# Altium PCB driver.PcbDoc
Units mil, origin at the board's own origin, x right, y up, seen from the top; angles counter-clockwise.
Board outline 1805.03 x 1255.03 mil, 2 copper layers (Top Layer, Bottom Layer); 24 components, 15 nets, 75 pads, 28 vias.
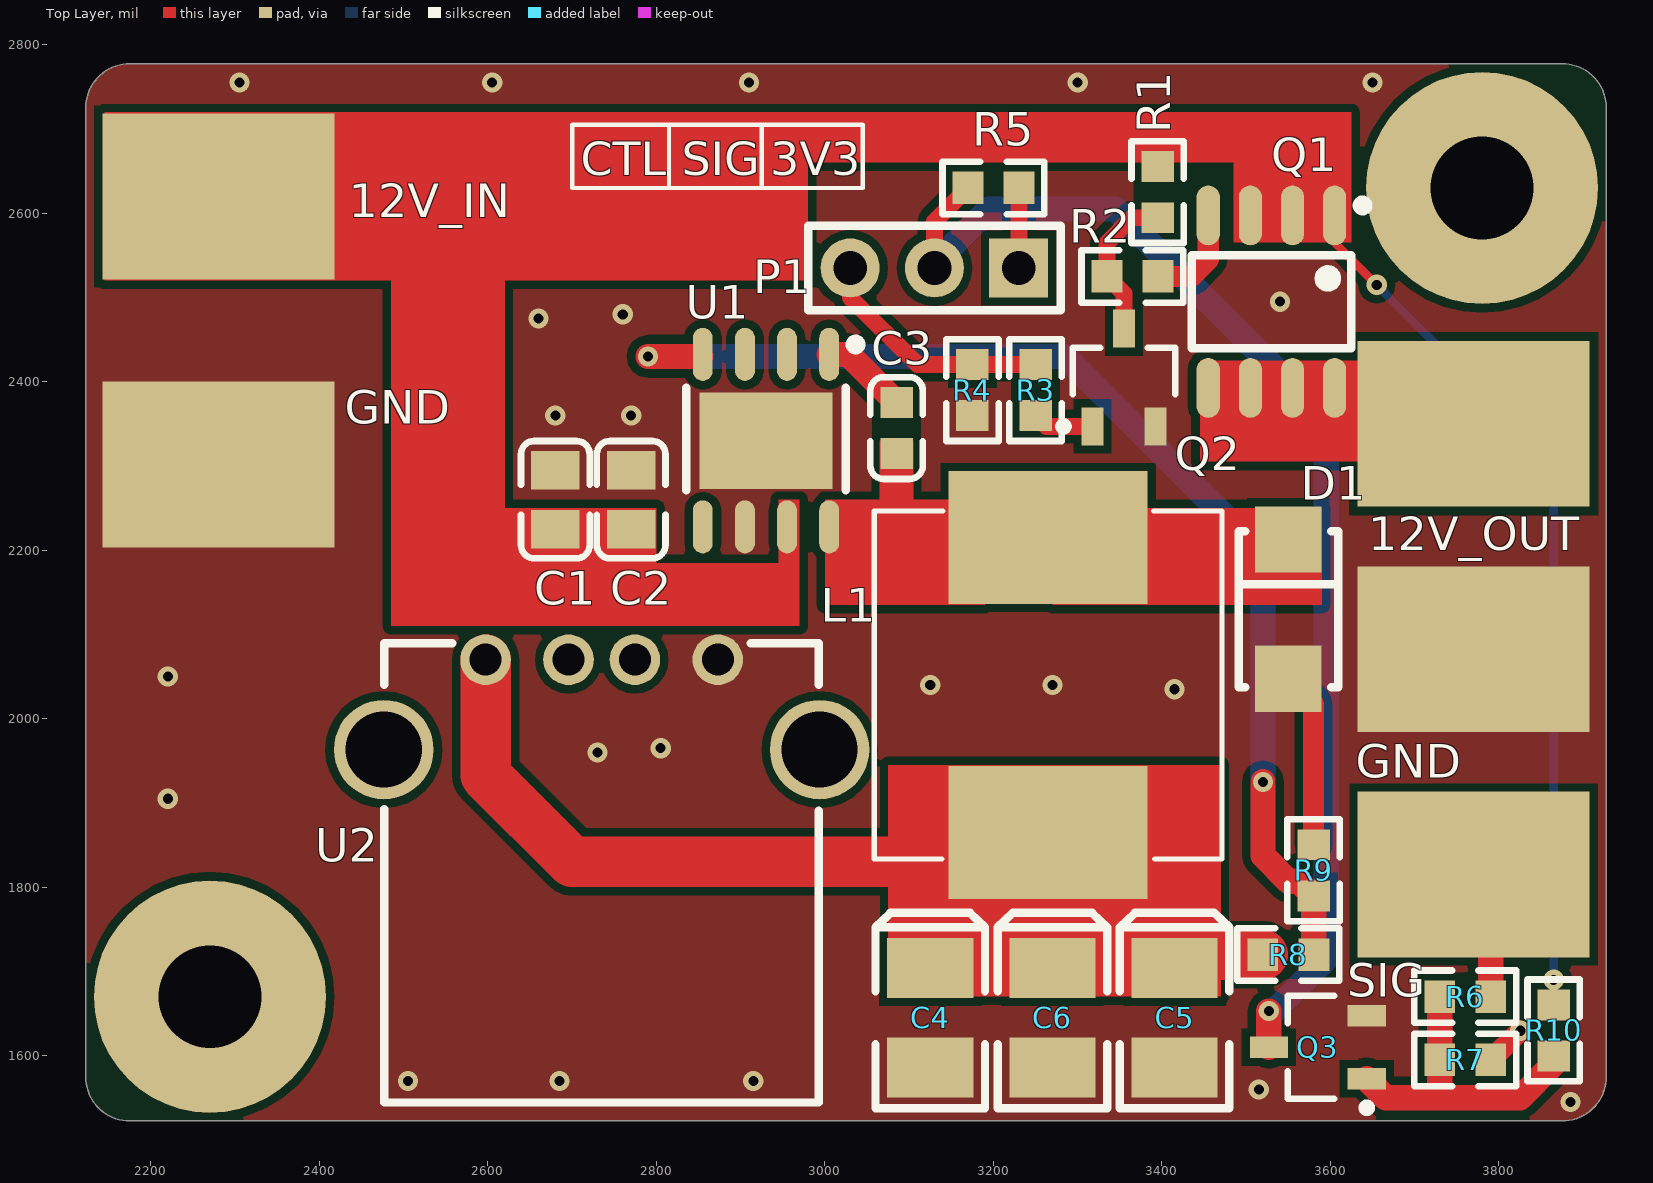
[diagram p0: Top Layer view]
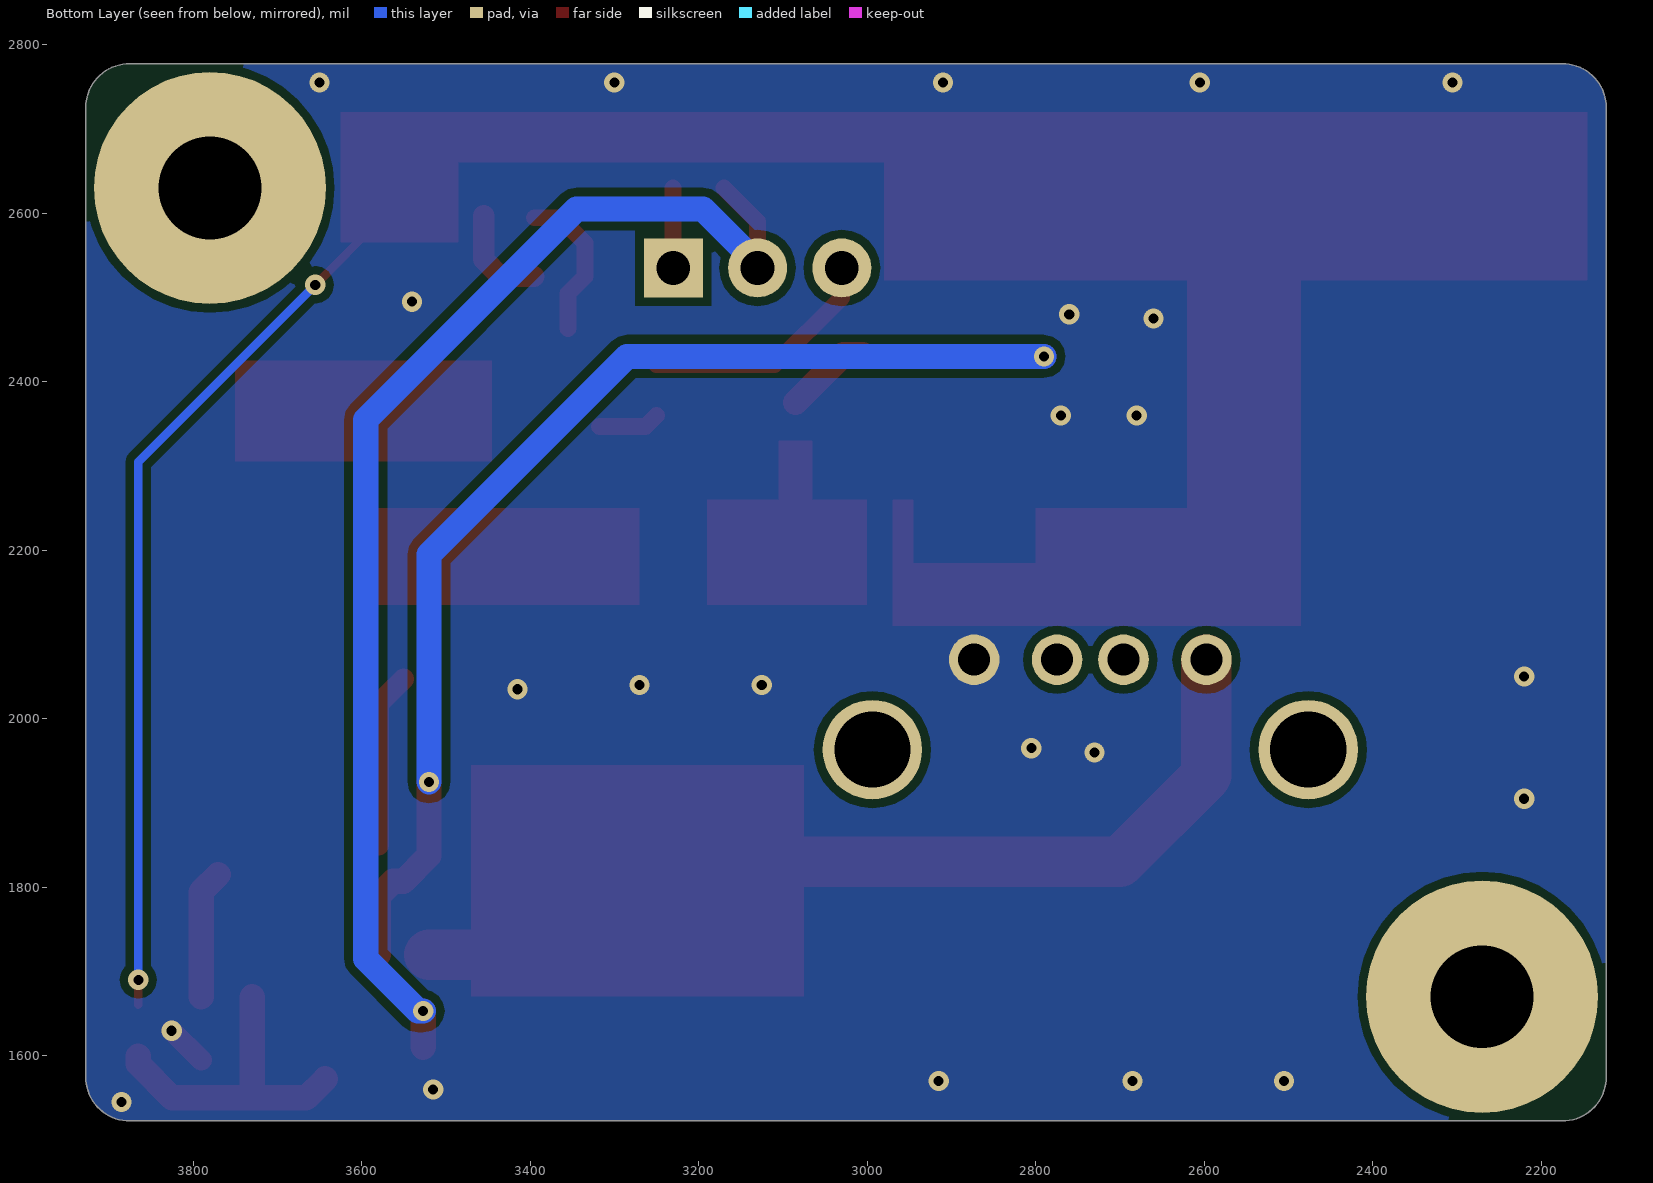
[diagram p1: Bottom Layer view, seen from below]
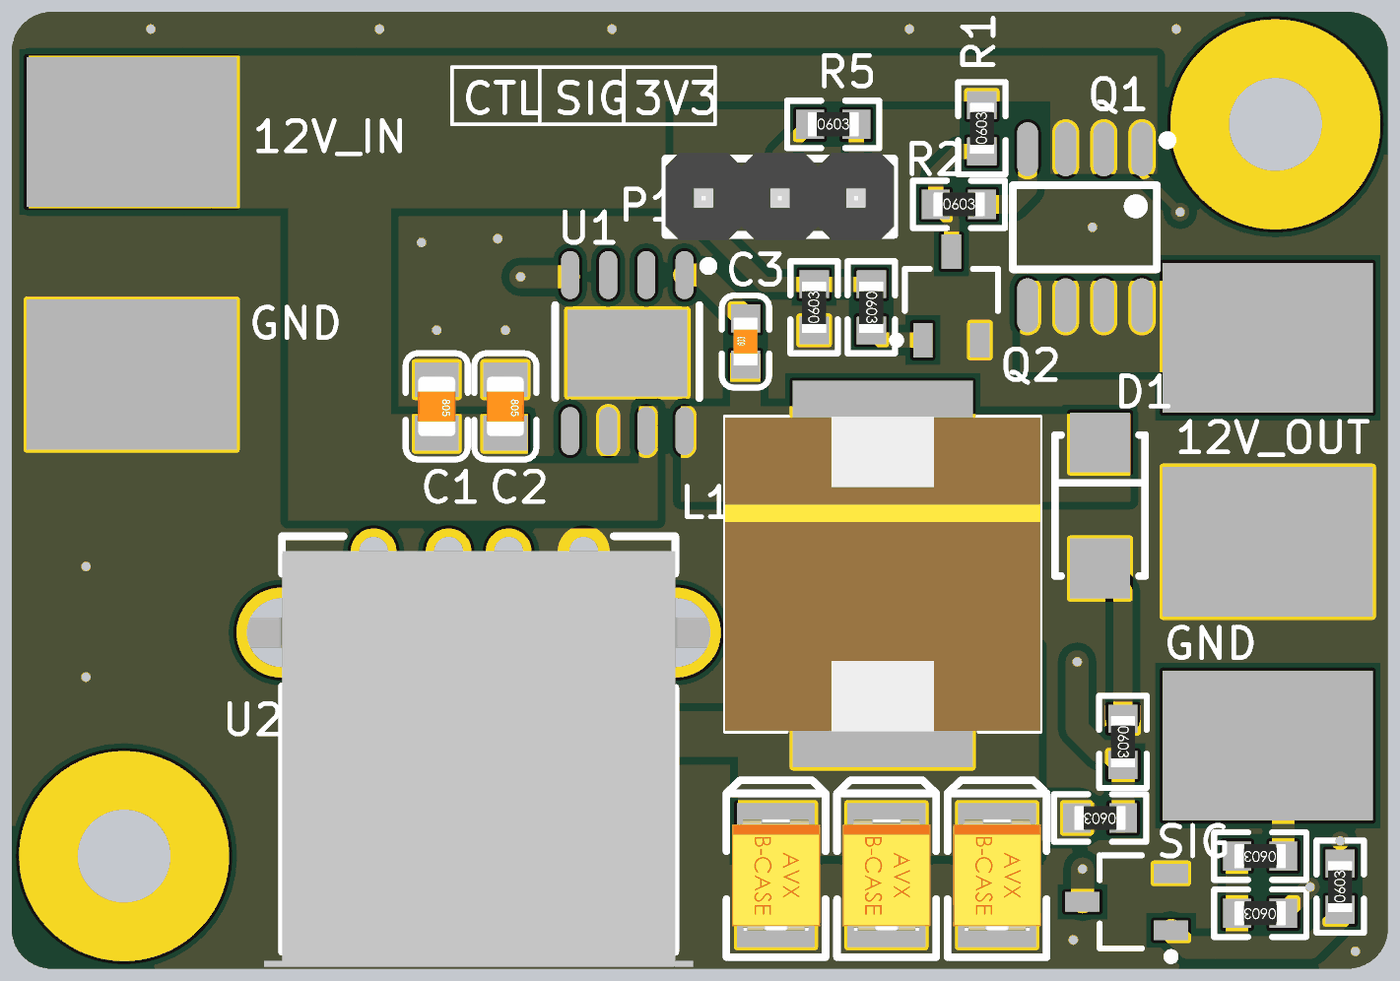
[diagram p2: 3D render of the assembled board from above, using the file's embedded part models]

## Layer stack, top to bottom
Top Solder: solder mask 0.4, Solder Resist, Dk 3.5
Top Layer: signal copper 1.4
Dielectric 1: dielectric 12.6, FR-4, Dk 4.8
Bottom Layer: signal copper 1.4
Bottom Solder: solder mask 0.4, Solder Resist, Dk 3.5

## Board outline
2122.49,1575 2122.49,2725 cw(c2175,2725) 2175,2777.51 3875,2777.51 cw(c3875,2725) 3927.51,2725 3927.51,1575 cw(c3875,1575) 3875,1522.48 2175,1522.48 cw(c2175,1575)

## Design rules (kind name [scope] priority, off if disabled: settings)
Clearance [All] p1: gap=10 ignorepadtopadclearanceinfootprint=FALSE except(0: Arc-Hole Track-Hole SMDPad-Hole THPad-Hole Via-Hole Fill-Hole Poly-Hole Region-Hole Text-Hole)
PolygonConnect [All] p1: connectstyle=Direct reliefconductorwidth=10 reliefentries=4 polygonreliefangle="90 Angle" airgapwidth=10
RoutingVias [All] p1: holewidth=28 width=50 viastyle="Through Hole" minholewidth=12 minwidth=12 maxholewidth=28 maxwidth=50
SolderMaskExpansion [All] p1: expansion=4
Width [All] p1: maxlimit=250 minlimit=10 preferedwidth=10
30 further rules are at their usual default settings.

## Components (designator, comment, footprint, x,y, rotation, side; value= is the part's Value field where it differs from the comment)
C1 "22uF (226) 20% 25V" 0805_C 2680,2260 r270 top
C2 "22uF (226) 20% 25V" 0805_C 2770,2260 r270 top
C3 "10nF (103) 10% 50V" 0603_C 3085,2345 r90 top
C4 "100uF (107) ±10% 6.3V" CASE-B_3528 3125,1645 r90 top
C5 "100uF (107) ±10% 6.3V" CASE-B_3528 3415,1645 r90 top
C6 "100uF (107) ±10% 6.3V" CASE-B_3528 3270,1645 r90 top
D1 "SS54" SMA(DO-214AC)_S1 3550,2130 r270 top
L1 "7447798131" WE-PDF-1045 3265,2040 r270 top value=13uH
P1 "0.1\" 3POS Header SNGL" "3 POS HEADER SINGLE ROW" 3230,2535 r180 top
Q1 "AO4407A" SOIC-8_150mil 3530,2495 r180 top
Q2 "AO3400A N道沟 X0YV1T SOT-23" SOT-23-3L 3355,2405 r270 top
Q3 "AO3400A N道沟 X0YV1T SOT-23" SOT-23-3L 3585,1610 r0 top
R1 "10KΩ (1002) ±1%" 0603_R 3395,2625 r90 top
R2 "1KΩ (1001) ±1%" 0603_R 3365,2525 r0 top
R3 "1KΩ (1001) ±1%" 0603_R 3250,2390 r270 top
R4 "10KΩ (1002) ±1%" 0603_R 3175,2390 r90 top
R5 "10KΩ (1002) ±1%" 0603_R 3200,2630 r0 top
R6 "30KΩ (3002) ±1%" 0603_R 3760,1670 r180 top
R7 "10KΩ (1002) ±1%" 0603_R 3760,1595 r180 top
R8 "10KΩ (1002) ±1%" 0603_R 3550,1720 r180 top
R9 "3.24KΩ ±1%" 0603_R 3580,1820 r270 top
R10 "100KΩ(NC)" 0603_R 3865,1630 r90 top
U1 "TPS5430DDAR" SOP-8_EP_150mil 2930,2330 r180 top
U2 "CONN RCPT USB TYPE A R/A GOLD" USB_A_RA_THRU 2735,2070 r0 top

## Footprints (in the part's own frame and the unit in brackets; to place one, negate y for a bottom-side part, rotate by r counter-clockwise, add the part's x,y. Pads: shape width x height; smd on the part's side, far side on the other; paste and mask are expansions set on the pad)
"3 POS HEADER SINGLE ROW" [mil]
  rect 70x70 hole 40.16: 1(0,0)
  round 70 hole 40.16: 2(100,0) 3(200,0)
  silkscreen extent -50,-50 250,50, body extent -50,-58 250,57, height 335
0603_C [mm]
  rect 0.93x0.98 smd: 1(-0.77,0) 2(0.77,0)
  silkscreen extent -1.53,-0.79 1.54,0.79, body extent -0.8,-0.4 0.8,0.4, height 0.3
0603_R [mm]
  rect 0.93x0.98 smd: 1(-0.77,0) 2(0.77,0)
  silkscreen extent -1.53,-0.79 1.54,0.79, body extent -0.85,-0.4 0.85,0.4, height 0.56
0805_C [mm]
  rect 1.16x1.47 smd: 1(-0.89,0) 2(0.89,0)
  silkscreen extent -1.77,-1.04 1.77,1.04, body extent -1,-0.62 1,0.63, height 0.77
CASE-B_3528 [mm]
  rect 1.8x2.6 smd: 1(1.5,0) 2(-1.5,0)
  silkscreen extent -2.73,-1.65 3.16,1.65, body extent -1.85,-1.47 1.85,1.46, height 2.03
SMA(DO-214AC)_S1 [mm]
  rect 2x2 smd: 1(2.1,0) 2(-2.1,0)
  silkscreen extent -2.35,-1.5 2.35,1.5
SOIC-8_150mil [mm]
  oval 0.7x1.8 smd: 1(-1.905,-2.6) 2(-0.635,-2.6) 3(0.635,-2.6) 4(1.905,-2.6) 5(1.905,2.6) 6(0.635,2.6) 7(-0.635,2.6) 8(-1.905,2.6)
  silkscreen extent -2.9,-3.05 2.4,1.4
SOP-8_EP_150mil [mm]
  rect 4x2.9 smd: 0(0,0)
  oval 0.6x1.6 smd: 1(-1.905,-2.6) 2(-0.635,-2.6) 3(0.635,-2.6) 4(1.905,-2.6) 5(1.905,2.6) 6(0.635,2.6) 7(-0.635,2.6) 8(-1.905,2.6)
  silkscreen extent -2.85,-3.05 2.4,1.5
SOT-23-3L [mm] "http://www.aosmd.com/res/packaging_information/SOT-23-3L.pdf"
  rect 1.15x0.65 smd: 1(1.475,-0.95) 2(1.475,0.95) 3(-1.475,0)
  silkscreen extent -0.9,-1.95 1.6,1.55, body extent -0.9,-1.55 0.9,1.55, height 1.25
USB_A_RA_THRU [mm]
  round 1.524 hole 0.965: 1(-3.5,0) 2(-1,0) 3(1,0) 4(3.5,0)
  round 3 hole 2.3: 5(-6.57,-2.71) 6(6.57,-2.71)
  silkscreen extent -6.55,-13.35 6.55,0.5, body extent -8,-13.85 8,0, height 7.53
WE-PDF-1045 [mm]
  rect 4x6 smd: 1(-4.445,0) 2(4.445,0)
  silkscreen extent -5.25,-5.25 5.25,5.25, body extent -5.25,-5.25 5.25,5.25, height 4.5

## Part data
C1 C2: library part "0805 22uF (226) 20% 25V", "贴片电容", Package=0805, SuppliersPartNumber=C45783, ComponentLink1Description=供应商链接, ComponentLink1URL=http://www.szlcsc.com/product/details_46786.html, Supplier=LC
C3: library part "0603 10nF (103) 10% 50V", "贴片电容", Package=0603, SuppliersPartNumber=C57112, ComponentLink1Description=供应商链接, ComponentLink1URL=http://www.szlcsc.com/product/details_58143.html, Supplier=LC
C4 C5 C6: library part "3528 100uF (107) 10% 6.3V", "钽电容", Package=3528, SuppliersPartNumber=C16133, ComponentLink1Description=供应商链接, ComponentLink1URL=http://www.szlcsc.com/product/details_16815.html, Supplier=LC
D1: library part "SMA(DO-214AC) SS54", "二极管", Package=SMA(DO-214AC), SuppliersPartNumber=C22452, ComponentLink1Description=供应商链接, ComponentLink1URL=http://www.szlcsc.com/product/details_23178.html, Supplier=LC
L1: "Unknown", Manufacturer Name="Wurth Elektronik", Manufacturer Part Number=7447798131, PackageReference=7447798131
P1: library part "CONN HEADER 3POS .100\" SNGL TIN", "CONN HEADER 3POS .100\" SNGL TIN", Manufacturer="Samtec Inc", Manufacturer Part Number=TSW-150-08-T-S, Package=header, Supplier 1 Part Number=SAM1050-50-ND, Component Type=Standard, Mounting Type=thru-hole, Part Number="CONN HEADER 3POS .100\" SNGL TIN", Pin Count=3, Price Break=1000, Supplier 1=Digikey, Unit Price-Supplier 1=2.24, Unit Price in Quantity=1.0189, Vendor/Distributor=Digikey
Q1: "MOS(场效应管)", Package=SOIC-8_150mil, SuppliersPartNumber=C16072, ComponentLink1Description=供应商链接, ComponentLink1URL=http://www.szlcsc.com/product/details_16754.html, Supplier=LC
Q2 Q3: "MOS(场效应管)", Package=SOT-23, SuppliersPartNumber=C20917, ComponentLink1Description=供应商链接, ComponentLink1URL=http://www.szlcsc.com/product/details_21629.html, Supplier=LC
R1 R4 R5 R7 R8: library part "0603 10KΩ (1002) 1%", "贴片电阻", Package=0603, SuppliersPartNumber=C25804, ComponentLink1Description=供应商链接, ComponentLink1URL=http://www.szlcsc.com/product/details_26547.html, Supplier=LC
R2 R3: library part "0603 1KΩ (1001) 1%", "贴片电阻", Package=0603, SuppliersPartNumber=C21190, ComponentLink1Description=供应商链接, ComponentLink1URL=http://www.szlcsc.com/product/details_21904.html, Supplier=LC
R6: library part "0603 30KΩ (3002) 1%", "贴片电阻", Package=0603, SuppliersPartNumber=C22984, ComponentLink1Description=供应商链接, ComponentLink1URL=http://www.szlcsc.com/product/details_23711.html, Supplier=LC
R9: library part "0603 3KΩ (3001) 1%", "贴片电阻", Package=0603, SuppliersPartNumber=C4211, ComponentLink1Description=供应商链接, ComponentLink1URL=http://www.szlcsc.com/product/details_4618.html, Supplier=LC
R10: library part "0603 100KΩ (1003) 1%", "贴片电阻", Package=0603, SuppliersPartNumber=C25803, ComponentLink1Description=供应商链接, ComponentLink1URL=http://www.szlcsc.com/product/details_26546.html, Supplier=LC
U1: library part TPS5430DDAR_[C9864], "DC-DCоƬ", Package=SOP-8_EP_150mil, SuppliersPartNumber=C9864, ComponentLink1Description=供应商链接, ComponentLink1URL=http://www.szlcsc.com/product/details_10396.html, Notepad="0 pin:        GND pin must be connected to the exposed pad for proper operation.", Supplier=LC
U2: Manufacturer="Amphenol Commercial Products", Manufacturer Part Number=UE27AC54100, Package=header, Supplier 1 Part Number=UE27AC54100-ND, Component Type=Standard, Mounting Type=thru-hole, Part Number="CONN RCPT USB TYPE A R/A GOLD", Part URL-Supplier 1=http://www.digikey.com/product-search/en?x=0&y=0&lang=en&site=us&KeyWords=UE27AC54100-ND, Pin Count=4, Price Break=1000, Supplier 1=Digikey, Unit Price-Supplier 1=.85, Unit Price in Quantity=.289, Vendor/Distributor=Digikey

## Free pads (board coordinates)
  rect 275.59x196.85 smd: 0(2280,2620) 0(3770,1815) 0(3770,2350) 1(2280,2301.67) 1(3770,2082.5)
  round 275.59 hole 122.05: 2(2270,1670) 2(3780,2630)

## Via types
v1: diameter 24, hole 12, Top Layer to Bottom Layer, tented both sides, 28 vias

## Nets (pads, with @x,y where several pads share a name; then routed paths per layer and width w, separated by ;. In a path a pad name is that pad's centre, name@x,y a point inside that pad or via, vN(x,y) a via of type N, cw(c..) or ccw(c..) an arc to the next point about the centre after c; other vN are vias at no path point)
3V3: P1.1 R5.2 | length 95.1
  Top Layer w20: P1.1 3230.32,2535.32 R5.2
5V: C4.1 C5.1 C6.1 L1.2 R8.2 U2.1 | length 798.9
  Top Layer w60: U2.1 2597.2,1932.8 2700,1830 3105,1830 ; C5.1 3430.94,1720 R8.2
12V_IN: C1.2 C2.2 pad.0@2280,2620 Q1.1 Q1.2 Q1.3 R1.2 R10.2 U1.7 | length 1047.7
  Top Layer w10: 3580,2590 v1(3655,2515) ; R10.2 v1(3865,1690)
  Bottom Layer w10: v1(3655,2515) 3865,2305 v1(3865,1690)
12V_OUT: pad.0@3770,2350 Q1.5 Q1.6 Q1.7 Q1.8
GND: C1.1 C2.1 C4.2 C5.2 C6.2 D1.1 pad.1 Q2.2 Q3.2 R4.1 R7.1 R9.1 U1.0 U1.6 U2.4 | length 258.9
  Top Layer w25: D1.1 3580,2017.32 R9.1 ; R7.1 3824.87,1629.55 v1(3825.45,1629.55)
  other v1: 3885,1545 3515,1560 2505,1570 2685,1570 2915,1570 2220,1905 2730,1960 2805,1965 3415,2035 3125,2040 3270,2040 2220,2050 2680,2360 2770,2360 2660,2475 2760,2480 3540,2495 2305,2755 2605,2755 2910,2755 3300,2755 3650,2755
NetC3_1: C3.1 D1.2 L1.1 U1.8
NetC3_2: C3.2 U1.1 | length 103.6
  Top Layer w30: U1.1 3027.95,2432.36 C3.2
NetP1_2: P1.2 Q3.3 R5.1 | length 1488.9
  Top Layer w20: P1.2 3130,2590.31 R5.1
  Top Layer w30: Q3.3 v1(3526.93,1653.07)
  Bottom Layer w30: P1.2 3130,2540.36 3194.64,2605 3345,2605 3595,2355 3595,1715 3533.07,1653.07 v1(3526.93,1653.07)
NetQ1_4: Q1.4 R2.2 | length 120.3
  Top Layer w25: R2.2 3435,2525 3455,2545 Q1.4
NetQ2_1: Q2.1 R3.2 | length 72.9
  Top Layer w20: R3.2 3262.76,2346.93 Q2.1
NetQ2_3: Q2.3 R1.1 R2.1 | length 182.8
  Top Layer w20: Q2.3 3355,2504.69 R2.1 3334.69,2564.69 3364.69,2594.69 R1.1
NetQ3_1: Q3.1 R6.2 R7.2 R10.1 | length 377.7
  Top Layer w30: Q3.1 3665.67,1550 3730,1550 ; R6.2 R7.2 3729.68,1550.32 3730,1550 ; R10.1 3865,1590 3825,1550 3730,1550
NetR8_1: R8.1 R9.2 U1.4 | length 1396.7
  Top Layer w30: v1(2790,2430) U1.4@2852.64,2430 ; v1(3520,1925) 3520,1837.36 3550.35,1807.01 3562.68,1807.01 R9.2 ; R8.1 R9.2@3580.31,1789.37
  Bottom Layer w30: v1(2790,2430) 3285,2430 3520,2195 v1(3520,1925)
ON/OFF: P1.3 R3.1 R4.2 | length 288
  Top Layer w20: P1.3 3030,2500 3109.68,2420.32 R4.2 R3.1
Signal: pad.0@3770,1815 R6.1 | length 153.4
  Top Layer w30: pad.0@3770,1815 3790.31,1794.69 R6.1
pads on no net: U1.2 U1.3 U1.5 U2.2 U2.3 U2.5 U2.6

## Polygon pours and split planes (outlines as drawn)
GND on Top Layer "GND_L01_P003" (solid, remove dead copper, pour order 3): 2122.49,1575 2122.49,2725 cw(c2175,2725) 2175,2777.51 3875,2777.51 cw(c3875,2725) 3927.51,2725 3927.51,1575 cw(c3875,1575) 3875,1522.48 2175,1522.48 cw(c2175,1575)
GND on Bottom Layer "GND_L02_P004" (solid, remove dead copper, pour order 4): 2122.49,1575 2122.49,2725 cw(c2175,2725) 2175,2777.51 3875,2777.51 cw(c3875,2725) 3927.51,2725 3927.51,1575 cw(c3875,1575) 3875,1522.48 2175,1522.48 cw(c2175,1575)

## Other copper
Top Layer:
  rectangle net 5V: 3075,1670 3470,1945
  rectangle net NetC3_1: 3270,2135 3590,2250
  rectangle net NetC3_1: 3065,2220 3105,2330
  rectangle net NetC3_1: 3000,2135 3190,2260
  rectangle net 12V_OUT: 3445,2305 3750,2425
  rectangle net 12V_IN: 2945,2140 2970,2260
  rectangle net 12V_IN: 2800,2110 2970,2185
  rectangle net 12V_IN: 2485,2150 2620,2695
  rectangle net 12V_IN: 2485,2110 2800,2250
  rectangle net 12V_IN: 3485,2565 3625,2720
  rectangle net 12V_IN: 2955,2660 3625,2720
  rectangle net 12V_IN: 2145,2520 2980,2720

## Silkscreen, mask and mechanical layers (free items; w line width, h text height)
Top Overlay:
  lines w5: 2815,2630 2815,2705 ; 2920,2630 2925,2630 2925,2705 ; 2700,2630 2700,2705 3045,2705 3045,2630 2700,2630
  text "CTL" at 2710,2645 h40
  text "SIG" at 2830,2645 h40
  text "3V3" at 2935,2645 h40
  text "12V_IN" at 2435,2595 h40
  text "GND" at 2430,2350 h40
  text "12V_OUT" at 3645,2200 h40
  text "GND" at 3630,1930 h40
  text "SIG" at 3620,1670 h40
Mechanical 1:
  lines w5: 2250,1525 3875,1525 ccw(c3875,1575) 3925,1575 3925,2725 ccw(c3875,2725) 3875,2775 2175,2775 ccw(c2175,2725) 2125,2725 2125,1575 ccw(c2175,1575) 2175,1525 2255,1525